# Altium PCB AS5600.PcbDoc
Units mil, origin at the board's own origin, x right, y up, seen from the top; angles counter-clockwise.
Board outline 1624.16 x 1622.05 mil, 2 copper layers (Top Layer, Bottom Layer); 44 components, 43 nets, 188 pads, 100 vias.
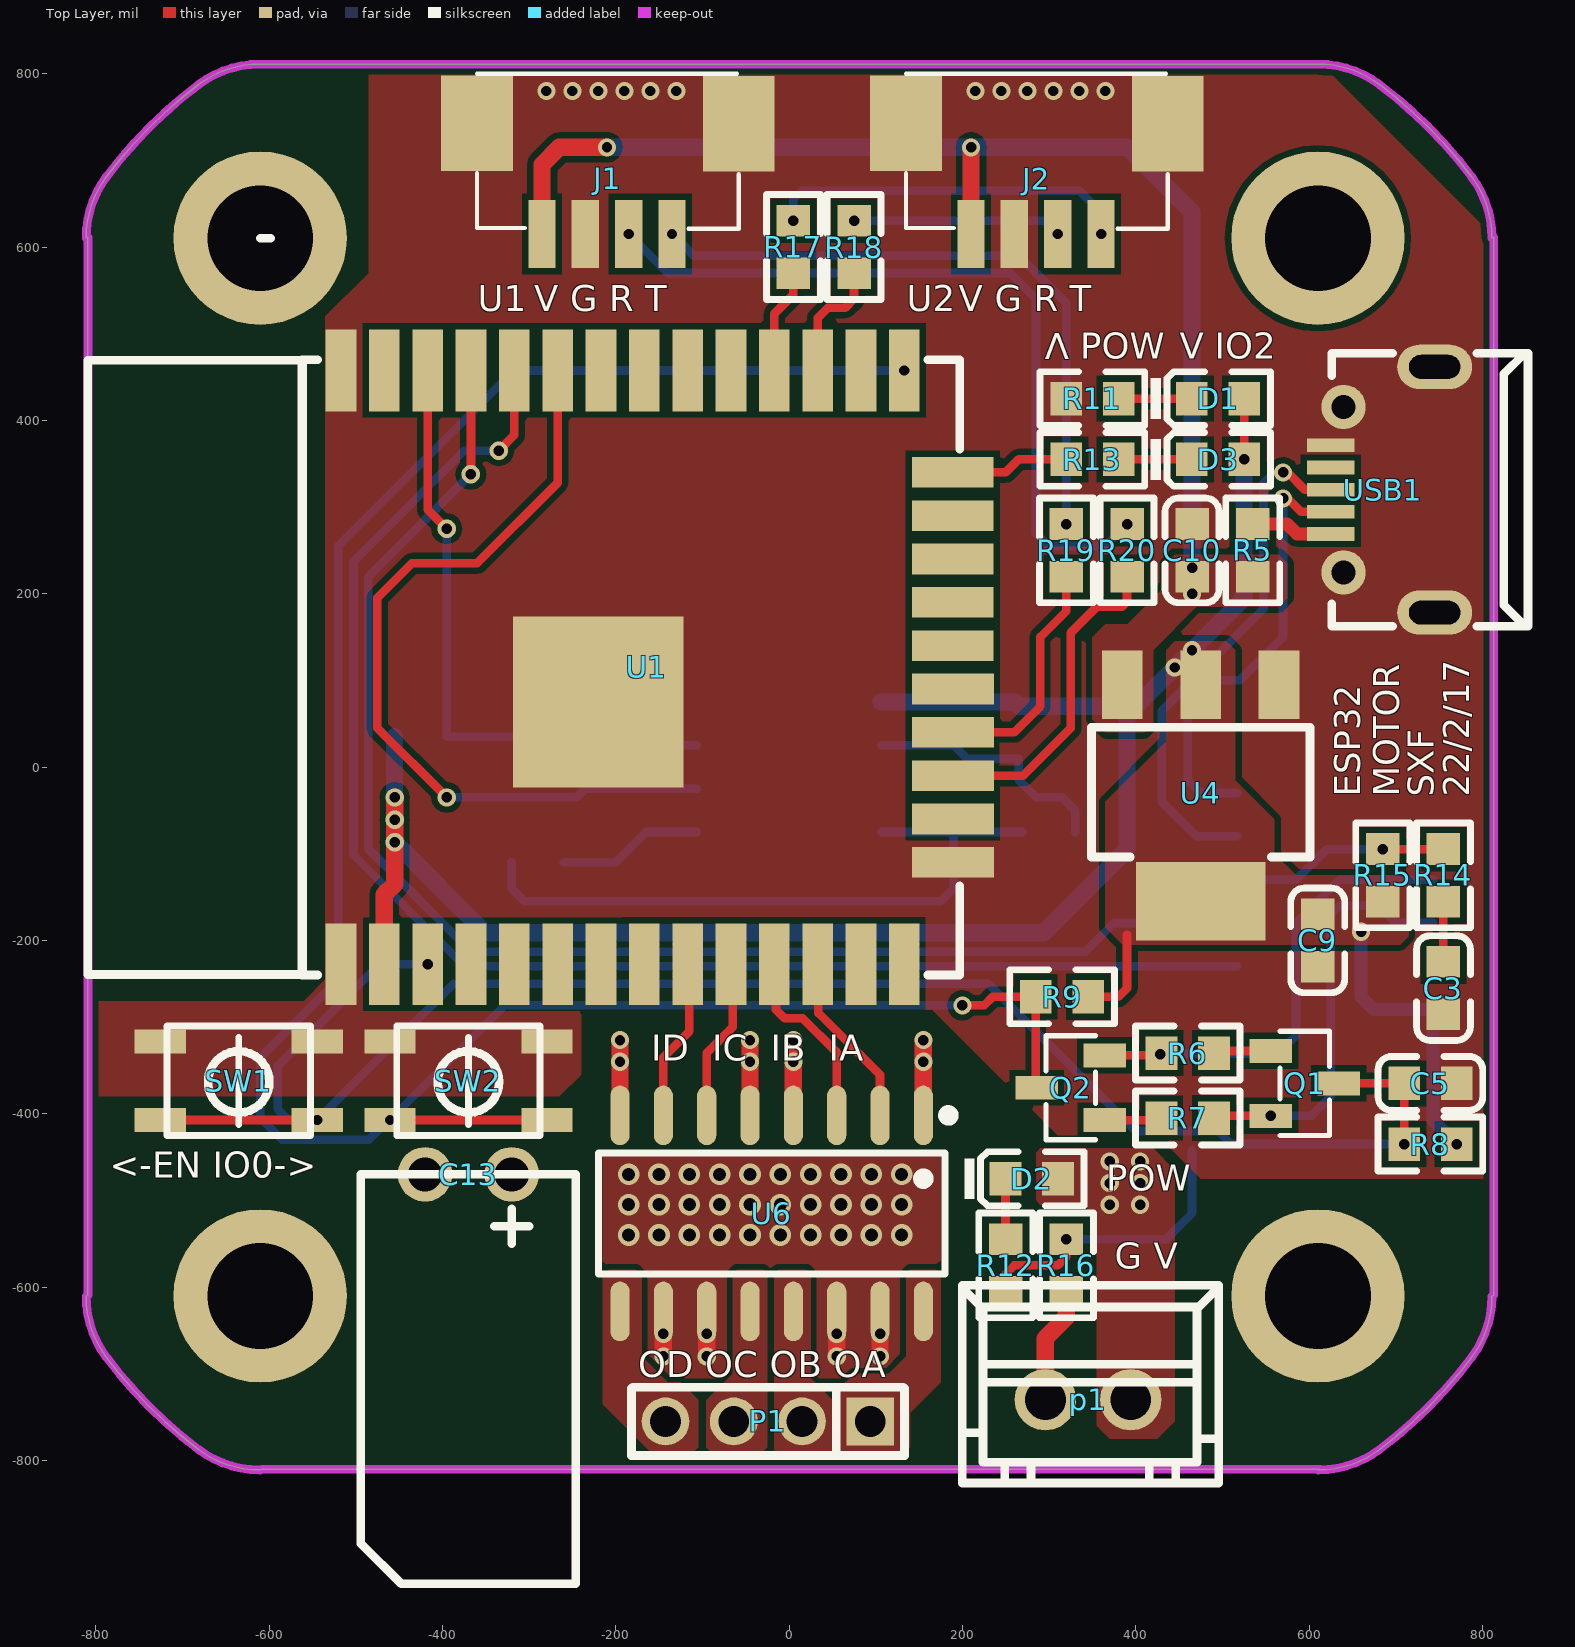
[diagram p0: Top Layer view]
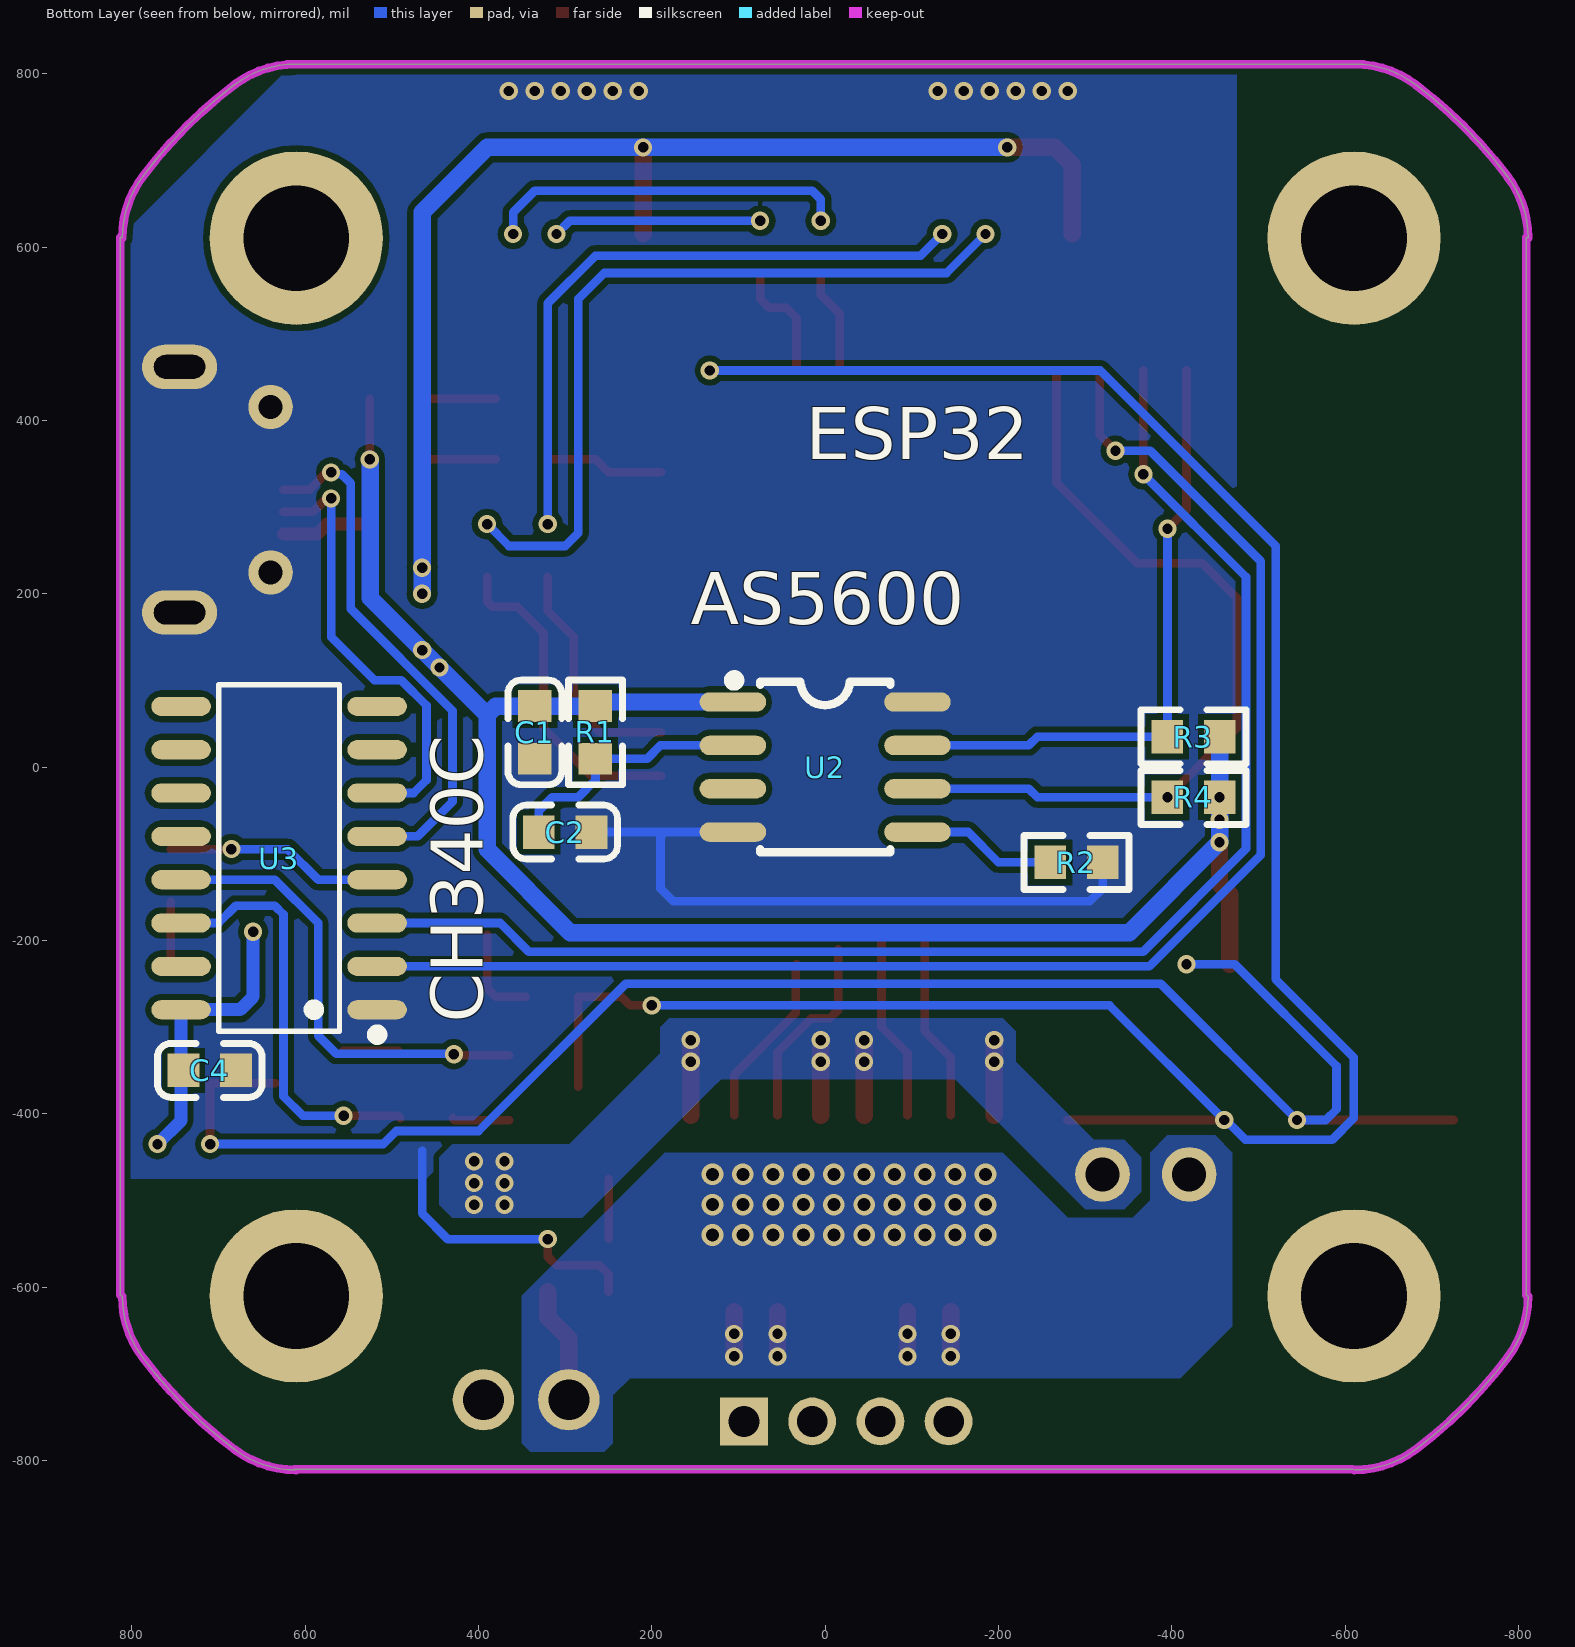
[diagram p1: Bottom Layer view, seen from below]
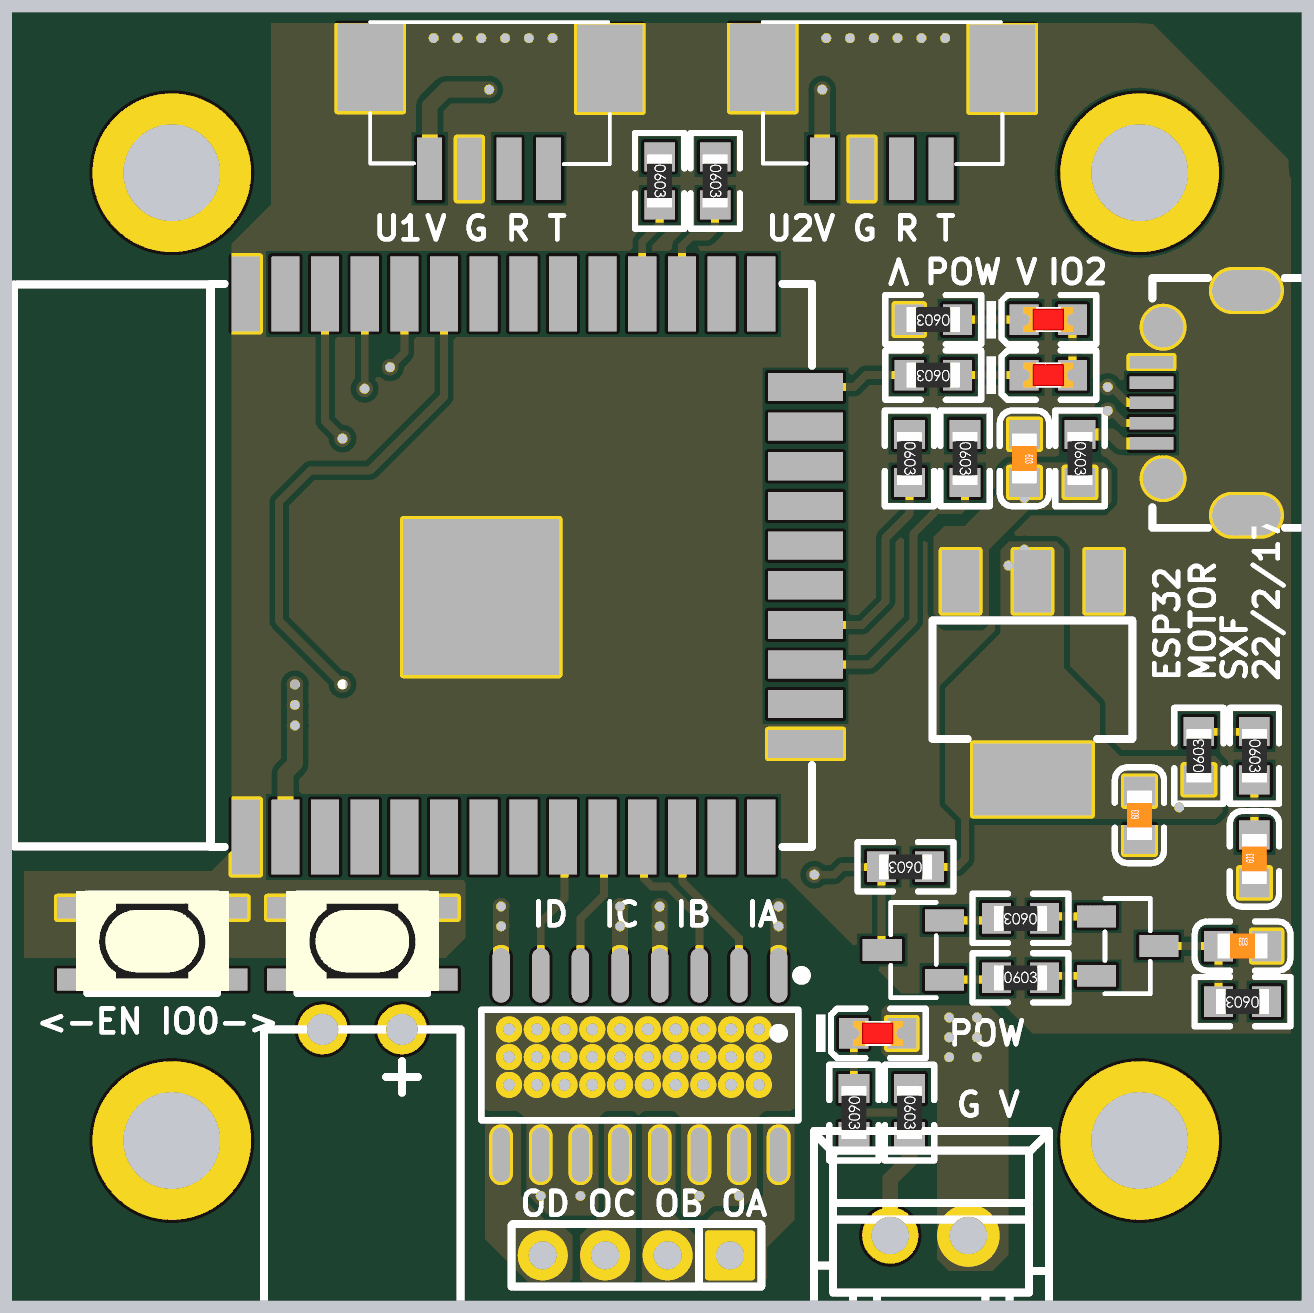
[diagram p2: 3D render of the assembled board from above, using the file's embedded part models]
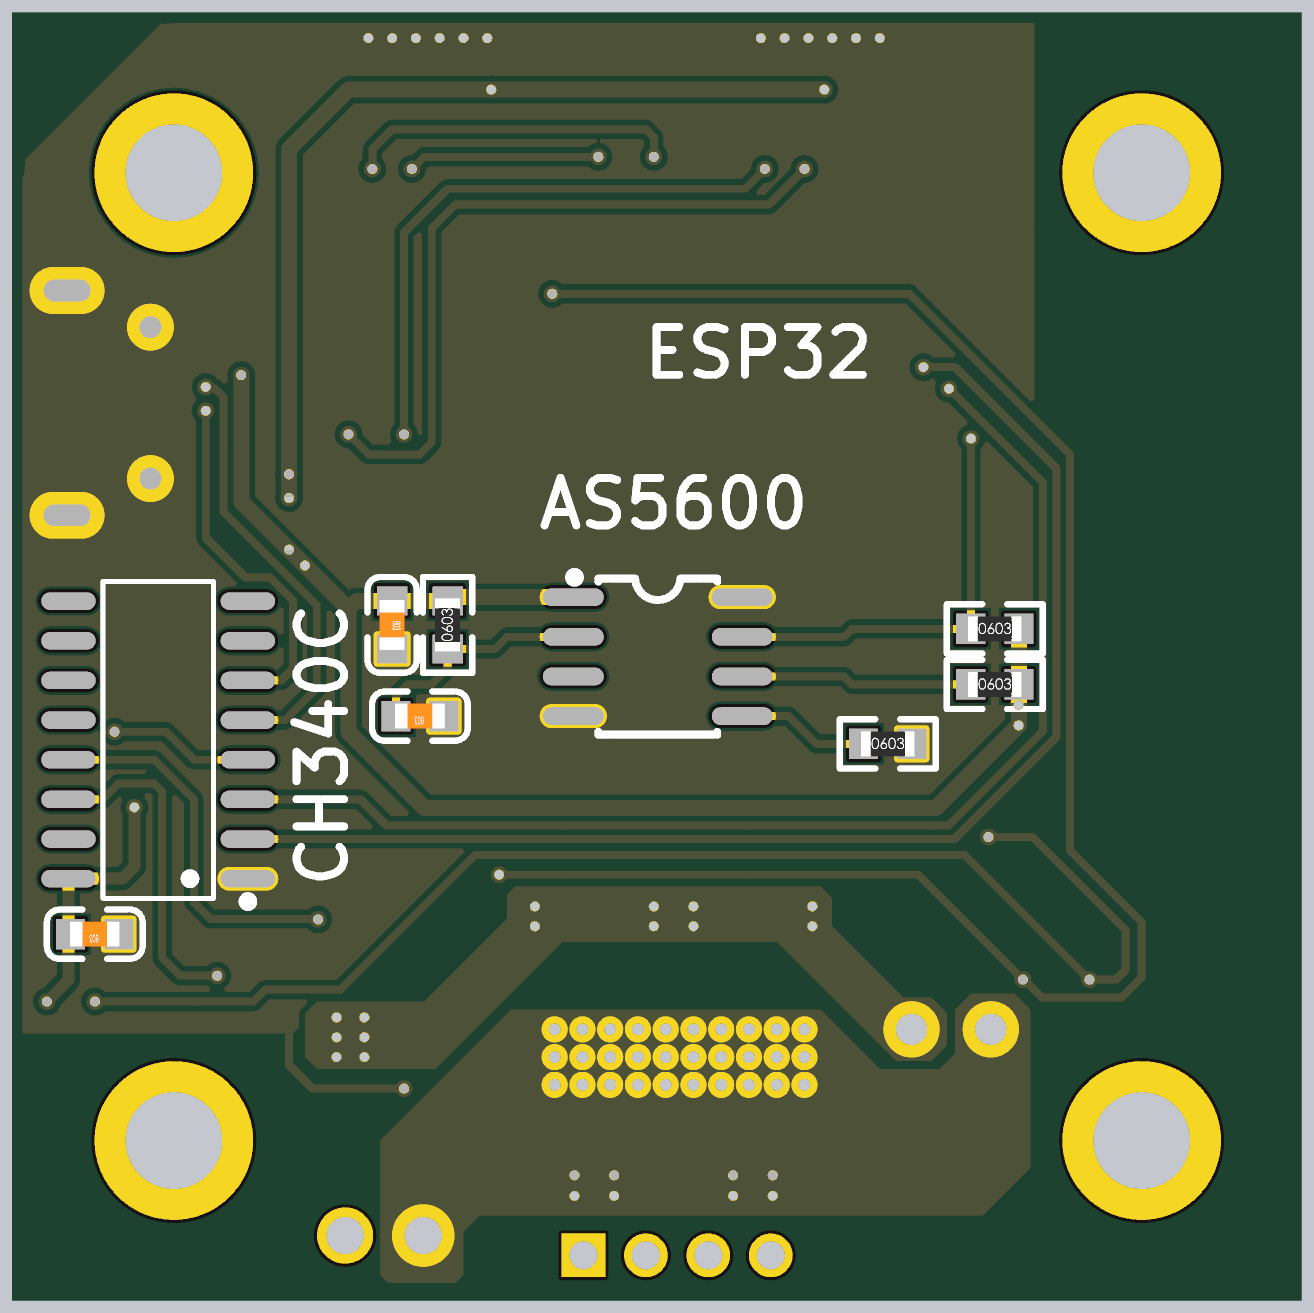
[diagram p3: 3D render of the assembled board from below, using the file's embedded part models]

## Layer stack, top to bottom
Top Solder: solder mask 0.4, Solder Resist, Dk 3.5
Top Layer: signal copper 1.4
Dielectric 1: dielectric 12.6, FR-4, Dk 4.8
Bottom Layer: signal copper 1.4
Bottom Solder: solder mask 0.4, Solder Resist, Dk 3.5

## Board outline
-787.11,-681.72 cw(c-692.91,-610.46) -811.02,-610.46 -808.91,-609.49 -808.91,611.44 -811.02,610.46 cw(c-692.91,610.46) -787.11,681.72 cw(c-354.33,354.33) -681.72,787.11 cw(c-610.46,692.91) -610.46,811.02 610.46,811.02 cw(c610.46,692.91) 681.72,787.11 cw(c354.33,354.33) 787.11,681.72 cw(c692.91,610.46) 811.02,610.46 813.14,611.44 813.14,-609.49 811.02,-610.46 cw(c692.91,-610.46) 787.11,-681.72 cw(c354.33,-354.33) 681.72,-787.11 cw(c610.46,-692.91) 610.46,-811.02 612.58,-810.05 -608.35,-810.05 -610.46,-811.02 cw(c-610.46,-692.91) -681.72,-787.11 cw(c-354.33,-354.33)

## Design rules (kind name [scope] priority, off if disabled: settings)
Clearance [All] p1: gap=7 ignorepadtopadclearanceinfootprint=FALSE
ComponentClearance [All] p1: gap=0 collisioncheckmode=3 verticalgap=0 showdistances=FALSE
HoleToHoleClearance [All] p1: gap=0 allowstackedmicrovias=TRUE
MinimumSolderMaskSliver [All] p1: minsoldermaskwidth=0
PlaneConnect [All] p1: planeconnectstyle=Direct reliefexpansion=20 reliefentries=4 reliefconductorwidth=10 reliefairgap=10
PolygonConnect [All] p1: connectstyle=Direct reliefconductorwidth=10 reliefentries=4 polygonreliefangle="90 Angle" airgapwidth=10
RoutingVias [All] p1: holewidth=28 width=50 viastyle="Through Hole" minholewidth=10 minwidth=10 maxholewidth=500 maxwidth=500
SilkToSilkClearance [All] p1: silktosilkclearance=0
SilkToSolderMaskClearance [IsPad] p1: minsilkscreentomaskgap=0 clearancetoexposedcopper=TRUE
SolderMaskExpansion [All] p1: expansion=4 istentingtop=FALSE
Width [All] p1: maxlimit=50 minlimit=5 preferedwidth=10
24 further rules are at their usual default settings.

## Components (designator, comment, footprint, x,y, rotation, side; value= is the part's Value field where it differs from the comment)
C1 "100nF (104) 10% 50V" 0603_C 335,40 r270 bottom
C2 "10uF (106) 10% 10V" 0603_C 300,-75 r0 bottom
C3 "1uF (105) 10% 50V" 0603_C 755,-255 r90 top
C4 "10uF (106) 10% 10V" 0603_C 710,-350 r0 bottom
C5 "10uF (106) 10% 10V" 0603_C 740,-365 r0 top
C9 "10uF (106) 10% 10V" 0603_C 610,-200 r90 top
C10 "10uF (106) 10% 10V" 0603_C 465,250 r270 top
C13 "220uf/6.3*12" 220UF_25V -370,-470 r180 top
D1 "红灯 0603" 0603_LED_S1 495,425 r0 top
D2 "红灯 0603" 0603_LED_S1 280,-475 r0 top
D3 "绿灯 0603" 0603_LED_S1 495,355 r0 top
J1 "GHS1.25 4P_1" SM04B-GHS卧式 -210,705 r0 top
J2 "GHS1.25 4P_1" SM04B-GHS卧式 285,705 r0 top
p1 "2PIN_H" CONN-TH_XH-2A 345,-730 r0 top
P1 "4PIN_2.0" 4PIN_2MM -496.81,-794.37 r180 top
Q1 "S8050" S8050 595,-365 r180 top
Q2 "S8050" S8050 325,-370 r0 top
R1 "0Ω (0R0) ±1%" 0603_R 265,40 r90 bottom
R2 "1KΩ (1001) ±1%" 0603_R -290,-110 r180 bottom
R3 "10KΩ (1002) ±1%" 0603_R -425,35 r180 bottom
R4 "10KΩ (1002) ±1%" 0603_R -425,-35 r180 bottom
R5 "0Ω (0R0) ±1%" 0603_R 535,250 r270 top
R6 "10KΩ (1002) ±1%" 0603_R 460,-330 r180 top
R7 "10KΩ (1002) ±1%" 0603_R 460,-405 r0 top
R8 "10KΩ (1002) ±1%" 0603_R 740,-435 r180 top
R9 "10KΩ (1002) ±1%" 0603_R 315,-265 r180 top
R11 "1KΩ (1001) ±1%" 0603_R 350,425 r180 top
R12 "1KΩ (1001) ±1%" 0603_R 250,-575 r270 top
R13 "1KΩ (1001) ±1%" 0603_R 350,355 r180 top
R14 "0Ω (0R0) ±1%" 0603_R 755,-125 r270 top
R15 "0Ω (0R0) ±1%" 0603_R 685,-125 r90 top
R16 "0Ω (0R0) ±1%" 0603_R 320,-575 r270 top
R17 "100Ω (1000) ±1%" 0603_R 5,600 r270 top
R18 "100Ω (1000) ±1%" 0603_R 75,600 r270 top
R19 "100Ω (1000) ±1%" 0603_R 320,250 r270 top
R20 "100Ω (1000) ±1%" 0603_R 390,250 r270 top
SW1 "按键开关" SW_SMD_4P_2 -635,-360 r0 top
SW2 "按键开关" SW_SMD_4P_2 -370,-360 r0 top
U1 "ESP32-WROOM-32D(8MB)" ESP-WROOM-32D -164.01,115.04 r90 top
U2 "AS5600-ASOT" AS5600-ASOT 0,0 r270 bottom
U3 "CH340C" CH340C 630,-105 r90 bottom
U4 "AMS1117-3.3_C498117" PG-SOT223-4_L6.5-W3.5-P2.30-LS7.0-BR 475,-30 r90 top
U6 "MX1616" MX1616 -20,-515 r180 top
USB1 "MICROXNJ" MICRO-USB-SMD_MICROXNJ 685,320 r90 top

## Footprints (in the part's own frame and the unit in brackets; to place one, negate y for a bottom-side part, rotate by r counter-clockwise, add the part's x,y. Pads: shape width x height; smd on the part's side, far side on the other; paste and mask are expansions set on the pad)
4PIN_2MM [mm]
  rect 1.4x1.4 hole 0.9: 1(-15,-1)
  round 1.4 hole 0.9: 2(-13,-1) 3(-11,-1) 4(-9,-1)
  silkscreen extent -16,-2 -8,0
220UF_25V [mm]
  round 1.6 hole 1: 1(-1.27,0) 2(1.27,0)
  silkscreen extent -3.15,0 3.15,12
0603_C [mm]
  rect 0.93x0.98 smd: 1(-0.77,0) 2(0.77,0)
  silkscreen extent -1.53,-0.79 1.54,0.79, body extent -0.8,-0.4 0.8,0.4, height 0.3
0603_LED_S1 [mm]
  rect 0.93x0.98 smd: A(0.77,0) K(-0.77,0)
  silkscreen extent -1.98,-0.79 1.54,0.79, body extent -0.8,-0.4 0.8,0.4, height 0.6
0603_R [mm]
  rect 0.93x0.98 smd: 1(-0.77,0) 2(0.77,0)
  silkscreen extent -1.53,-0.79 1.54,0.79, body extent -0.85,-0.4 0.85,0.4, height 0.56
AS5600-ASOT [mil]
  oval 22.38x76.78 smd: 1(-75,-106.5) 2(-25,-106.5) 3(25,-106.5) 4(75,-106.5) 5(75,106.5) 6(25,106.5) 7(-25,106.5) 8(-75,106.5)
  silkscreen extent -106,-111 98,75
CH340C [mm]
  oval 0.56x1.745 smd: 1(-4.445,-2.873) 2(-3.175,-2.873) 3(-1.905,-2.873) 4(-0.635,-2.873) 5(0.635,-2.873) 6(1.905,-2.873) 7(3.175,-2.873) 8(4.445,-2.873) 9(4.445,2.873) 10(3.175,2.873) 11(1.905,2.873) 12(0.635,2.873) 13(-0.635,2.873) 14(-1.905,2.873) 15(-3.175,2.873) 16(-4.445,2.873)
  silkscreen extent -5.33,-3.02 5.08,1.77
CONN-TH_XH-2A [mm]
  round 1.8 hole 1.199: 1(-1.251,0) 2(1.251,0)
  silkscreen extent -3.69,-2.45 3.83,3.35
ESP-WROOM-32D [mm]
  rect 2.4x0.9 smd: 1(-8.7,8.965) 2(-8.7,7.695) 3(-8.7,6.425) 4(-8.7,5.155) 5(-8.7,3.885) 6(-8.7,2.615) 7(-8.7,1.345) 8(-8.7,0.075) 9(-8.7,-1.195) 10(-8.7,-2.465) 11(-8.7,-3.735) 12(-8.7,-5.005) 13(-8.7,-6.275) 14(-8.7,-7.545) 25(8.7,-7.545) 26(8.7,-6.275) 27(8.7,-5.005) 28(8.7,-3.735) 29(8.7,-2.465) 30(8.7,-1.195) 31(8.7,0.075) 32(8.7,1.345) 33(8.7,2.615) 34(8.7,3.885) 35(8.7,5.155) 36(8.7,6.425) 37(8.7,7.695) 38(8.7,8.965)
  rect 0.9x2.4 smd: 15(-5.715,-8.965) 16(-4.445,-8.965) 17(-3.175,-8.965) 18(-1.905,-8.965) 19(-0.635,-8.965) 20(0.635,-8.965) 21(1.905,-8.965) 22(3.175,-8.965) 23(4.445,-8.965) 24(5.715,-8.965)
  rect 5x5 smd: 39(-1.017,1.422)
  silkscreen extent -9.02,-9.17 9.02,16.39
MICRO-USB-SMD_MICROXNJ [mm]
  rect 0.4x1.4 smd: 1(-1.3,1.521) 2(-0.65,1.521) 3(0,1.521) 4(0.65,1.521) 5(1.3,1.521)
  round 1.3 hole 0.7: 6(2.425,1.149) 9(-2.425,1.149)
  oval 1.3x2.2 hole 0.7 slot 1.5 at 90 deg: 7(3.6,-1.521) 8(-3.6,-1.521)
  silkscreen extent -4,-4.26 4,1.49
MX1616 [mm]
  oval 0.56x1.745 smd: 1(-4.445,-2.873) 2(-3.175,-2.873) 3(-1.905,-2.873) 4(-0.635,-2.873) 5(0.635,-2.873) 6(1.905,-2.873) 7(3.175,-2.873) 8(4.445,-2.873) 9(4.445,2.873) 10(3.175,2.873) 11(1.905,2.873) 12(0.635,2.873) 13(-0.635,2.873) 14(-1.905,2.873) 15(-3.175,2.873) 16(-4.445,2.873)
  silkscreen extent -5.33,-3.02 5.08,1.77
PG-SOT223-4_L6.5-W3.5-P2.30-LS7.0-BR [mm]
  rect 2x1.2 smd: 1(3.175,-2.3) 2(3.175,0) 3(3.175,2.3)
  rect 2.3x3.8 smd: 4(-3.175,0)
  silkscreen extent -1.87,-3.2 1.93,3.2
S8050 [mm]
  rect 1.25x0.7 smd: 1(1,-0.95) 2(1,0.95) 3(-1,0)
  silkscreen extent -0.73,-1.53 0.73,1.53
SM04B-GHS卧式 [mm]
  rect 0.8x2 smd: 1(1.905,-2.286) 2(0.635,-2.286) 3(-0.635,-2.286) 4(-1.905,-2.286)
  rect 2.1x2.8 smd: 5(3.861,0.94) 6(-3.81,0.965)
  silkscreen extent -3.81,-2.13 3.86,2.41
SW_SMD_4P_2 [mm]
  rect 1.5x0.7 smd: 1(2.301,-1.201) 2(-2.298,-1.201) 3(2.301,1.099) 4(-2.298,1.099)
  silkscreen extent -2.1,-1.65 2.1,1.55, body extent -2.45,-1.57 2.45,1.63, height 2.51

## Part data
C1: library part "0603 100nF (104) 10% 50V", "贴片电容", Package=0603, SuppliersPartNumber=C14663, ComponentLink1Description=供应商链接, ComponentLink1URL=http://www.szlcsc.com/product/details_15331.html, Supplier=LC
C2 C4 C5 C9 C10: library part "0603 10uF (106) 10% 10V", "贴片电容", Package=0603, SuppliersPartNumber=C19702, ComponentLink1Description=供应商链接, ComponentLink1URL=http://www.szlcsc.com/product/details_20411.html, Supplier=LC
C3: library part "0603 1uF (105) 10% 50V", "贴片电容", Package=0603, SuppliersPartNumber=C15849, ComponentLink1Description=供应商链接, ComponentLink1URL=http://www.szlcsc.com/product/details_16531.html, Supplier=LC
C13: library part "220uf 25Vv"
D1 D2: library part "0603 红灯", "发光二极管", Package=0603, SuppliersPartNumber=C2286, ComponentLink1Description=供应商链接, ComponentLink1URL=http://www.szlcsc.com/product/details_2659.html, Supplier=LC
D3: library part "0603 绿灯", "发光二极管", Package=0603, SuppliersPartNumber=C72043, ComponentLink1Description=供应商链接, ComponentLink1URL=http://www.szlcsc.com/product/details_73152.html, Supplier=LC
J1 J2: "卧式"
Q1 Q2: library part S8050_C2894711, BOM_Manufacturer=PUOLOP(迪浦), BOM_Manufacturer Part=S8050, BOM_Supplier=LCSC, BOM_Supplier Part=C2894711, Contributor=LCSC, spicePre=Q, spiceSymbolName=S8050_C2894711
R1 R5 R14 R15 R16: library part "0603 0Ω (0R0) 1%", "贴片电阻", Package=0603, SuppliersPartNumber=C21189, ComponentLink1Description=供应商链接, ComponentLink1URL=http://www.szlcsc.com/product/details_21903.html, Supplier=LC
R2 R11 R12 R13: library part "0603 1KΩ (1001) 1%", "贴片电阻", Package=0603, SuppliersPartNumber=C21190, ComponentLink1Description=供应商链接, ComponentLink1URL=http://www.szlcsc.com/product/details_21904.html, Supplier=LC
R3 R4 R6 R7 R8 R9: library part "0603 10KΩ (1002) 1%", "贴片电阻", Package=0603, SuppliersPartNumber=C25804, ComponentLink1Description=供应商链接, ComponentLink1URL=http://www.szlcsc.com/product/details_26547.html, Supplier=LC
R17 R18 R19 R20: library part "0603 100Ω (1000) 1%", "贴片电阻", Package=0603, SuppliersPartNumber=C22775, ComponentLink1Description=供应商链接, ComponentLink1URL=http://www.szlcsc.com/product/details_23502.html, Supplier=LC
SW1 SW2: library part SW_SMD_4P
U1: BOM_JLCPCB Part Class="Extended Part", BOM_Manufacturer="Espressif Systems", BOM_Manufacturer Part=ESP32-WROOM-32D(8MB), BOM_Supplier=LCSC, BOM_Supplier Part=C529577, Contributor=LCSC, spicePre=U, spiceSymbolName=ESP32-WROOM-32D(8MB)
U2: BOM_JLCPCB Part Class="Extended Part", BOM_Manufacturer="Advanced Monolithic Systems", BOM_Manufacturer Part=AS5600-ASOT, BOM_Supplier=LCSC, BOM_Supplier Part=C499458, Contributor=LCSC, spicePre=U, spiceSymbolName=AS5600-ASOT
U3: BOM_JLCPCB Part Class="Extended Part", BOM_Manufacturer=WCH, BOM_Manufacturer Part=CH340C, BOM_Supplier=LCSC, BOM_Supplier Part=C84681, spicePre=U, spiceSymbolName=CH340C
U4: BOM_JLCPCB Part Class="Extended Part", BOM_Manufacturer="HGC(Huaguan Semicon)", BOM_Manufacturer Part=AMS1117-3.3, BOM_Supplier=LCSC, BOM_Supplier Part=C498117, Contributor=LCSC, spicePre=U, spiceSymbolName=AMS1117-3.3_C498117
USB1: BOM_JLCPCB Part Class="Extended Part", BOM_Manufacturer="SHOU HAN", BOM_Manufacturer Part=MicroXNJ, BOM_Supplier=LCSC, BOM_Supplier Part=C404969, Contributor=LCSC, spicePre=U, spiceSymbolName=MICROXNJ

## Free pads (board coordinates)
  round 200 hole 122.05: ""(-610.24,-610.24) ""(-610.24,610.24) ""(610.24,-610.24) ""(610.24,610.24)

## Via types
v1: diameter 21, hole 12, Top Layer to Bottom Layer, tented both sides, 70 vias
v2: diameter 25, hole 15, Top Layer to Bottom Layer, 30 vias

## Nets (pads, with @x,y where several pads share a name; then routed paths per layer and width w, separated by ;. In a path a pad name is that pad's centre, name@x,y a point inside that pad or via, vN(x,y) a via of type N, cw(c..) or ccw(c..) an arc to the next point about the centre after c; other vN are vias at no path point)
3V3: C1.1 C4.2 C9.2 D1.A D3.A R1.2 R3.2 R4.2 R8.1 R9.1 R15.1 U1.2 U2.1 U3.16 U4.2 U4.4 | length 2553.7
  Top Layer w10: R9.1 380,-265 389.89,-255.11 389.89,-193.8 ; v1(525.32,355) D1.A
  Top Layer w20: U1.2 -466.97,-146.97 -455,-135 v1(-455,-86.76) v1(-455,-60.88) v1(-455,-35)
  Bottom Layer w15: v1(660,-190) 660,-265 675,-280 U3.16 743.09,-407.78 v1(770.31,-435)
  Bottom Layer w20: v1@-455.32,-60.88 R4.2 R3.2 ; v1(-455,-60.88) -455,-61.15 -455.32,-61.46 -455.32,-85.74 -455.19,-85.86 -455.19,-86.57 v1(-455,-86.76) -454.81,-86.95 -350.76,-191 294,-191 390,-95 390,60 ; U2.1 260.32,75 R1.2 C1.1 335.32,70 380,70 390,60 ; v1(525.32,355) 525.12,354.81 525.12,354.1 525,353.98 525,195 390,60
  other v1: 444.9,114.9 464.9,134.9
5V: C10.2 J1.4 J2.4 R5.2 U4.3 | length 1409.4
  Top Layer w20: J1.4 -285,695 -265,715 v1(-210,715) ; J2.4 v1(210,715)
  Bottom Layer w20: v1(-210,715) v1(210,715) 390,715 465,640 v1(465,200)
  other v1: 465,230
ADC_OUT: U2.3
D+: U3.5 USB1.3 | length 610.7
  Top Layer w10: v1(570,340) 575,340 595,320 USB1.3
  Bottom Layer w10: U3.5 470,-80 430,-40 430,65 547.49,182.49 547.49,327.49 557.9,337.9 567.9,337.9 v1(570,340)
D-: U3.6 USB1.2 | length 513.4
  Top Layer w10: v1(570,310) 575,310 590.59,294.41 USB1.2
  Bottom Layer w10: U3.6 475,-30 460,-15 460,70.96 489.04,100 520,100 570,150 v1(570,310)
DTR: Q2.2 R6.2 U3.13 | length 540.6
  Top Layer w10: Q2.2 427.09,-332.6 R6.2
  Bottom Layer w10: v1(428.39,-331.3) 428.82,-330.86 564.14,-330.86 585,-310 585,-180 635,-130 U3.13
EN: C5.1 Q1.3 R8.2 SW1.1 SW1.2 U1.3 | length 2044.6
  Top Layer w10: SW1.2 v1(-544.41,-407.28) ; Q1.3 C5.1 v1(709.68,-435)
  Bottom Layer w10: v1(-416.97,-227.48) -472.48,-227.48 -590,-345 -590,-395 -577.72,-407.28 v1(-544.41,-407.28) -387.13,-250 230,-250 400,-420 495,-420 510,-435 v1(709.68,-435)
GND: C1.2 C2.1 C3.1 C4.1 C5.2 C9.1 C10.1 J1.3 J1.5 J1.6 J2.3 J2.5 J2.6 R2.2 R11.2 R12.2 R16.1 SW1.3 SW1.4 SW2.3 SW2.4 U1.1 U1.15 U1.38 U1.39 U2.4 U2.8 U3.1 U4.1 USB1.5 USB1.6 USB1.7 USB1.8 USB1.9 | length 1131
  Top Layer w10: R12.2 250,-585 260,-575 310,-575 320,-565 v1(320,-544.69)
  Bottom Layer w10: R2.2 -320.32,-139.68 -305,-155 175,-155 190,-140 190,-80 185,-75 ; U2.4 185,-75 ; C2.1 185,-75 ; v1(320,-544.69) 435.31,-544.69 465,-515 465,-443.07
  other v1: -280,780 -250,780 -220,780 -190,780 -160,780 -130,780 215,780 245,780 275,780 305,780 335,780 365,780
INA: U1.12 U6.2 | length 204.2
  Top Layer w10: U1.12 33.86,-228.31 33.86,-283.86 105,-355 U6.2
INB: U1.11 U6.3 | length 233.1
  Top Layer w10: U1.11@-15,-210.03 -15,-280 -5,-290 15.96,-290 55,-329.04 U6.3
INC: U1.10 U6.6 | length 217
  Top Layer w10: U6.6 -95,-330 -65,-300 U1.10@-65,-197.29
IND: U1.9 U6.7 | length 215.3
  Top Layer w10: U6.7 -145,-335 -115,-305 U1.9@-115,-199.05
IO0: Q2.3 R9.2 SW2.1 SW2.2 U1.25 | length 2692.7
  Top Layer w10: v1(-460.47,-407.28) SW2.1 ; v1(200,-275) 225,-275 235,-265 R9.2 Q2.3@284.68,-369.05
  Bottom Layer w10: v1(133.03,457.55) -317.44,457.55 -520,255 -520,-245 -610,-335 -610,-405 -585,-430 -485,-430 -462.28,-407.28 v1(-460.47,-407.28) -328.19,-275 v1(200,-275)
IO2: R13.2 U1.24 | length 137
  Top Layer w10: U1.24 250.04,340.04 265.04,355.04 319.65,355.04 R13.2
NetC2_2: C2.2 R1.1 U2.2 | length 294.2
  Bottom Layer w10: U2.2 190,25 205.31,9.69 R1.1 265,-15 285,-35 315,-35 330.31,-50.31 C2.2
NetC3_2: C3.2 R14.2 | length 69.4
  Top Layer w10: C3.2 R14.2
NetD1_K: D1.K R11.1 | length 84.4
  Top Layer w10: R11.1 D1.K
NetD2_K: D2.K R12.1 | length 69.4
  Top Layer w10: R12.1@249.69,-544.37 D2.K
NetD3_K: D3.K R13.1 | length 84.4
  Top Layer w10: R13.1 D3.K
NetJ1_1: J1.1 R19.1 | length 742.8
  Bottom Layer w10: v1(-135,615) -110,590 265,590 320,535 v1(320,280.31)
NetJ1_2: J1.2 R20.1 | length 892.8
  Bottom Layer w10: v1(-185,615) -140,570 255,570 285,540 285,270 300,255 364.69,255 v1(390,280.31)
NetJ2_1: J2.1 R17.1 | length 419.2
  Bottom Layer w10: v1(5,630.31) 5,655 15,665 335,665 360,640 v1(360,615)
NetJ2_2: J2.2 R18.1 | length 241.3
  Bottom Layer w10: v1(75,630.31) 294.69,630.31 v1(310,615)
NetQ1_1: Q1.1 R6.1 | length 66.3
  Top Layer w10: R6.1 492.72,-327.6 Q1.1
NetQ2_1: Q2.1 R7.1 | length 66.3
  Top Layer w10: Q2.1 427.28,-407.4 R7.1
NetR2_1: R2.1 U2.5 | length 167.7
  Bottom Layer w10: R2.1 -200,-110 -165,-75 U2.5
NetR14_1: R14.1 R15.2 U3.4 | length 252.7
  Top Layer w10: v1(685,-94.68) R14.1
  Bottom Layer w10: U3.4 585,-130 620.32,-94.68 v1(685,-94.68)
OUTA: P1.1 U6.16
OUTB: P1.2 U6.13
OUTC: P1.3 U6.12
OUTD: P1.4 U6.9
PGND: C13.2 p1.1 R16.2 U6.10 U6.11 U6.14 U6.15 | length 342.4
  Top Layer w20: v1(-145,-680) U6.10 ; v1(-95,-680) U6.11 ; v1(55,-680) U6.14 ; v1(105,-680) U6.15 ; p1.1 295.75,-659.25 320,-635 R16.2
  other v1: -145,-654.05 -95,-654.05 55,-654.05 105,-654.05
  other v2: -185,-540 -150,-540 -115,-540 -80,-540 -45,-540 -10,-540 25,-540 60,-540 95,-540 130,-540 -185,-505 -150,-505 -115,-505 -80,-505 -45,-505 -10,-505 25,-505 60,-505 95,-505 130,-505 -185,-470 -150,-470 -115,-470 -80,-470 -45,-470 -10,-470 25,-470 60,-470 95,-470 130,-470
RTS: Q1.2 R7.2 U3.14 | length 485.6
  Top Layer w10: R7.2 492.91,-402.4 v1(555.63,-402.4)
  Bottom Layer w10: v1(555.63,-402.4) 555.87,-402.16 602.84,-402.16 625,-380 625,-170 635,-160 680,-160 700,-180 U3.14
RX0: U1.34 U3.2 | length 1732.1
  Top Layer w10: v1(-335,365) -316.97,383.03 U1.34
  Bottom Layer w10: v1(-335,365) -375,365 -502.62,237.38 -502.62,-101.42 -374.04,-230 U3.2
RX1: R20.2 U1.17 | length 377.5
  Top Layer w10: U1.17 188.98,-10 270,-10 325,45 325,155 355,185 384.14,185 390,190.86 R20.2
RX2: R18.2 U1.27 | length 141.2
  Top Layer w10: U1.27 33.03,518.03 45,530 65,530 75,540 R18.2
SCL: R3.1 U1.36 U2.7 | length 724.1
  Top Layer w10: U1.36 -416.97,296.97 v1(-395,275)
  Bottom Layer w10: v1(-395,275) -395,35.31 R3.1 -245,35 -235,25 U2.7
SDA: R4.1 U1.33 U2.6 | length 948.1
  Top Layer w10: v1(-395,-35) -475,45 -475,195 -435,235 -360,235 -266.97,328.03 U1.33
  Bottom Layer w10: R4.1 -245,-35 -235,-25 U2.6
TX0: U1.35 U3.3 | length 1666.4
  Top Layer w10: v1(-367.16,337.84) -366.97,338.03 U1.35
  Bottom Layer w10: v1(-367.16,337.84) -485.62,219.38 -485.62,-94.38 -367,-213 342,-213 375,-180 U3.3
TX1: R19.2 U1.18 | length 275.6
  Top Layer w10: U1.18 188.98,40 260,40 290,70 290,150 320,180 R19.2
TX2: R17.2 U1.28 | length 121.2
  Top Layer w10: U1.28 -16.97,523.03 5,545 R17.2
VBUS: R5.1 USB1.1 | length 94.9
  Top Layer w15: R5.1 574.69,280.31 586.18,268.82 USB1.1
VIN: C13.1 D2.A p1.2 U6.1 U6.4 U6.5 U6.8 | length 347.6
  Top Layer w20: U6.8 v1(-195,-315) ; U6.5 v1(-45,-315) ; U6.4 v1(5,-315) ; U6.1 v1(155,-315)
  other v1: 370,-505 405,-505 370,-480 405,-480 370,-455 405,-455 -195,-340 -45,-340 5,-340 155,-340
pads on no net: U1.4 U1.5 U1.6 U1.7 U1.8 U1.13 U1.14 U1.16 U1.19 U1.20 U1.21 U1.22 U1.23 U1.26 U1.29 U1.30 U1.31 U1.32 U1.37 U3.7 U3.8 U3.9 U3.10 U3.11 U3.12 U3.15 USB1.4

## Polygon pours and split planes (outlines as drawn)
PGND on Top Layer "PGND_L01_P015" (solid, pour order 15): -215,-445 175,-445 175,-670 140,-705 -195,-705 -215,-685
GND on Top Layer "GND_L01_P011" (solid, pour order 11): -535,810 615,810 815,610 815,-475 475,-475 425,-425 310,-425 165,-280 -240,-280 -240,-355 -265,-380 -810,-380 -810,-270 -560,-270 -535,-245
3V3 on Top Layer "3V3_L01_P009" (solid, pour order 9): 435,135 445,145 505,145 515,135 515,-15 560,-60 560,-100 585,-125 705,-125 715,-135 715,-195 705,-205 385,-205 365,-185 365,-40 435,30
5V on Top Layer "5V_L01_P008" (solid, pour order 8): 565,245 575,235 575,195 565,185 470,185 420,135 420,50 410,40 365,40 350,55 350,150 365,165 390,165 435,210 435,235 445,245
OUTA on Top Layer "OUTA_L01_P006" (solid, pour order 6): 140,-580 170,-580 175,-585 175,-710 140,-745 140,-785 130,-795 65,-795 57.58,-787.58 57.58,-717.42 75,-700 115,-700 135,-680 135,-585
OUTB on Top Layer "OUTB_L01_P005" (solid, pour order 5): -12.2,-580 20,-580 25,-585 25,-705 50,-730 50,-788.16 43.16,-795 -10,-795 -17.03,-787.97 -17.03,-584.13
OUTC on Top Layer "OUTC_L01_P004" (solid, pour order 4): -60,-580 -30,-580 -25,-585 -25,-710 -25,-785 -35,-795 -85.24,-795 -95.71,-784.53 -95.71,-730.71 -65,-700 -65,-585
OUTD on Top Layer "OUTD_L01_P003" (solid, pour order 3): -207.32,-580 -177.33,-580 -170,-587.33 -170,-680 -140,-710 -125,-710 -105,-730 -105,-785 -120,-800 -150,-800 -215,-735 -215,-587.68
VIN on Top Layer "VIN_L01_P001" (solid, pour order 1): 290,-505 340,-505 355,-520 355,-760 370,-775 425,-775 445,-755 445,-465 420,-440 290,-440 285,-445 285,-500
VIN on Top Layer "VIN_L01_P000" (solid, pour order 0): 360,-505
PGND on Bottom Layer "PGND_L02_P016" (solid, pour order 16): -450,-425 -395,-425 -375,-445 -375,-500 -355,-520 -280,-520 -205,-445 185,-445 350,-610 350,-780 340,-790 255,-790 245,-780 245,-725 225,-705 -410,-705 -470,-645 -470,-445
GND on Bottom Layer "GND_L02_P014" (solid, pour order 14): -475,810 625,810 625,800 815,610 815,-475 460,-475 225,-240 -370,-240 -475,-135
VIN on Bottom Layer "VIN_L02_P002" (solid, pour order 2): -365,-450 -345,-430 -310,-430 -220,-340 -220,-305 -205,-290 180,-290 190,-300 190,-330 295,-435 430,-435 445,-450 445,-505 430,-520 280,-520 130,-370 120,-360 -150,-360 -300,-510 -345,-510 -365,-490

## Keep-outs
Keep-Out Layer:
  lines w10: -811.02,-610.46 ccw(c-692.91,-610.46) -787.11,-681.72 ccw(c-354.33,-354.33) -681.72,-787.11 ccw(c-610.46,-692.91) -610.46,-811.02 ; -811.02,610.46 cw(c-692.91,610.46) -787.11,681.72 cw(c-354.33,354.33) -681.72,787.11 cw(c-610.46,692.91) -610.46,811.02 610.46,811.02 cw(c610.46,692.91) 681.72,787.11 cw(c354.33,354.33) 787.11,681.72 cw(c692.91,610.46) 811.02,610.46 ; -808.91,-609.49 -808.91,611.44 ; -608.35,-810.05 612.58,-810.05 ; 610.46,-811.02 ccw(c610.46,-692.91) 681.72,-787.11 ccw(c354.33,-354.33) 787.11,-681.72 ccw(c692.91,-610.46) 811.02,-610.46 ; 813.14,-609.49 813.14,611.44

## Other copper
Top Layer:
  pour cut-out: -628.21,806.79 -485,806.78 -485,570 -555,500 -810,500 -810,625

## Silkscreen, mask and mechanical layers (free items; w line width, h text height)
Top Overlay:
  lines w10: -610.24,610.24 -598.17,610.24
  text "U1" at -359,526 h30
  text "V G R T" at -294,526 h30
  text "U2" at 136,526 h30
  text "V G R T" at 196,526 h30
  text "V" at 323.26,500.77 h30 r180
  text "POW" at 336,471 h30
  text "V" at 451,471 h30
  text "IO2" at 491,471 h30
  text "ESP32" at 659,-34 h30 r90
  text "MOTOR" at 704,-34 h30 r90
  text "SXF" at 744,-34 h30 r90
  text "22/2/17" at 784.71,-34 h30 r90
  text "ID  IC  IB  IA" at -159,-339 h30
  text "<-EN IO0->" at -784,-474 h30
  text "POW" at 366,-489 h30
  text "G V" at 376,-579 h30
  text "OD OC OB OA" at -174,-704 h30
Bottom Overlay:
  text "ESP32" at 22.38,355 h60
  text "AS5600" at 155,165 h60
  text "CH340C" at 395,-295 h60 r270